# EAGLE board USBRALite14 (EAGLE 6.6.0)
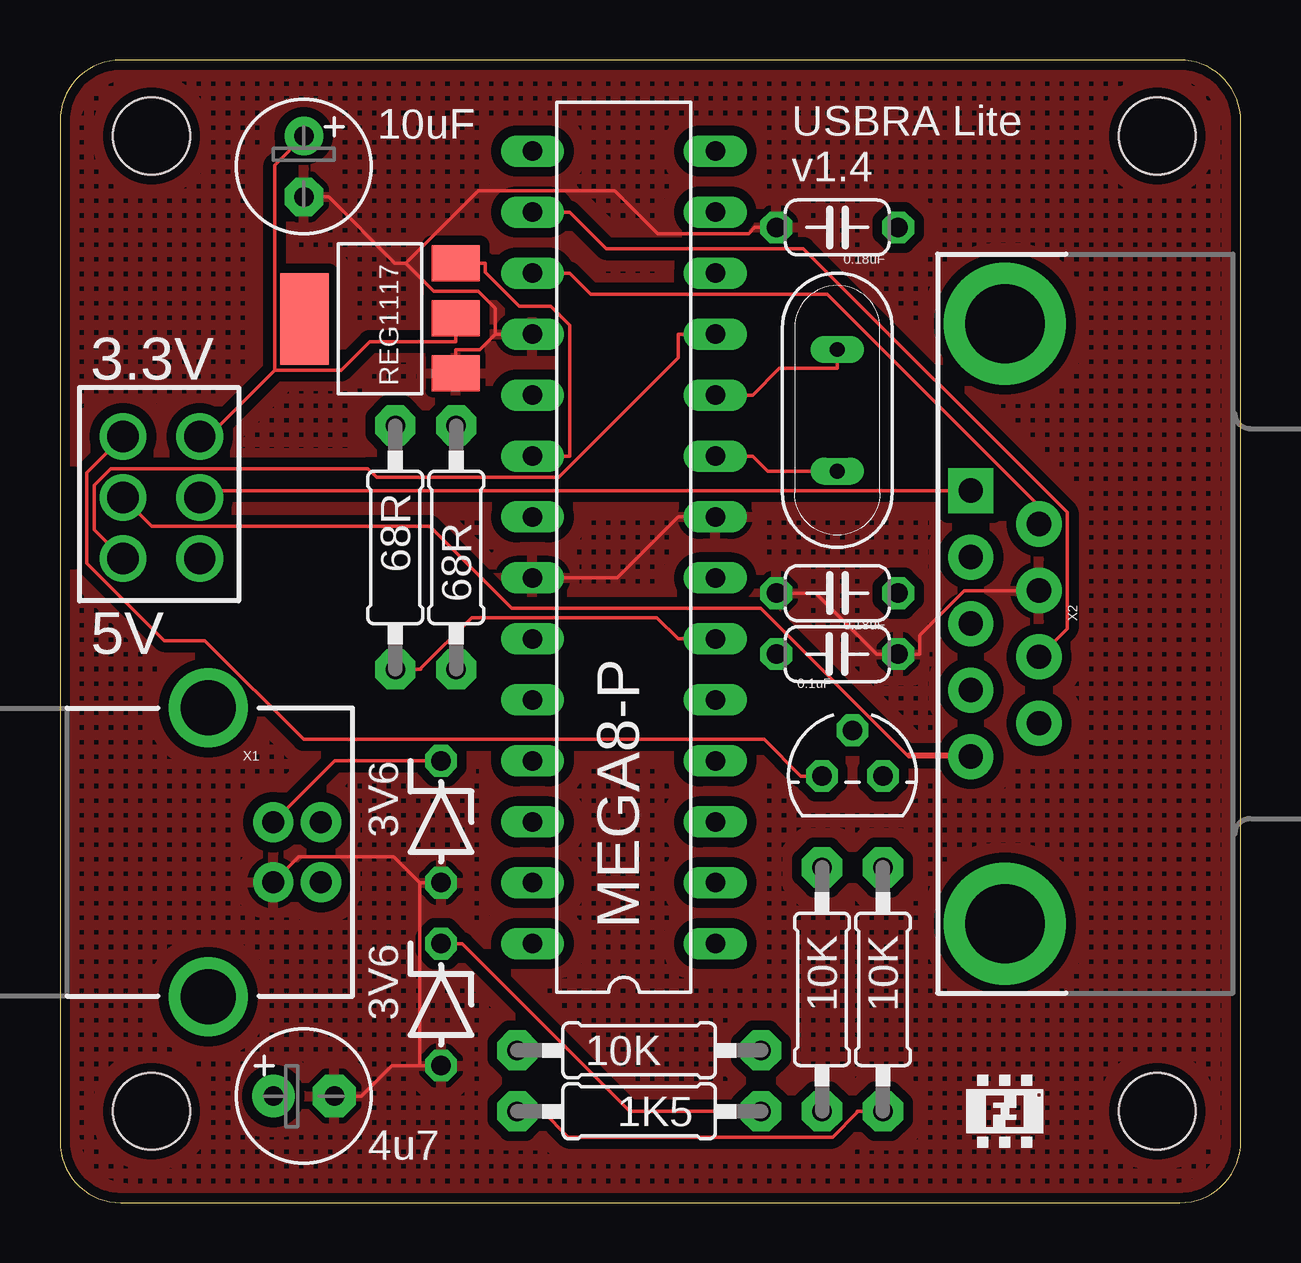
[diagram p0: board, top side]
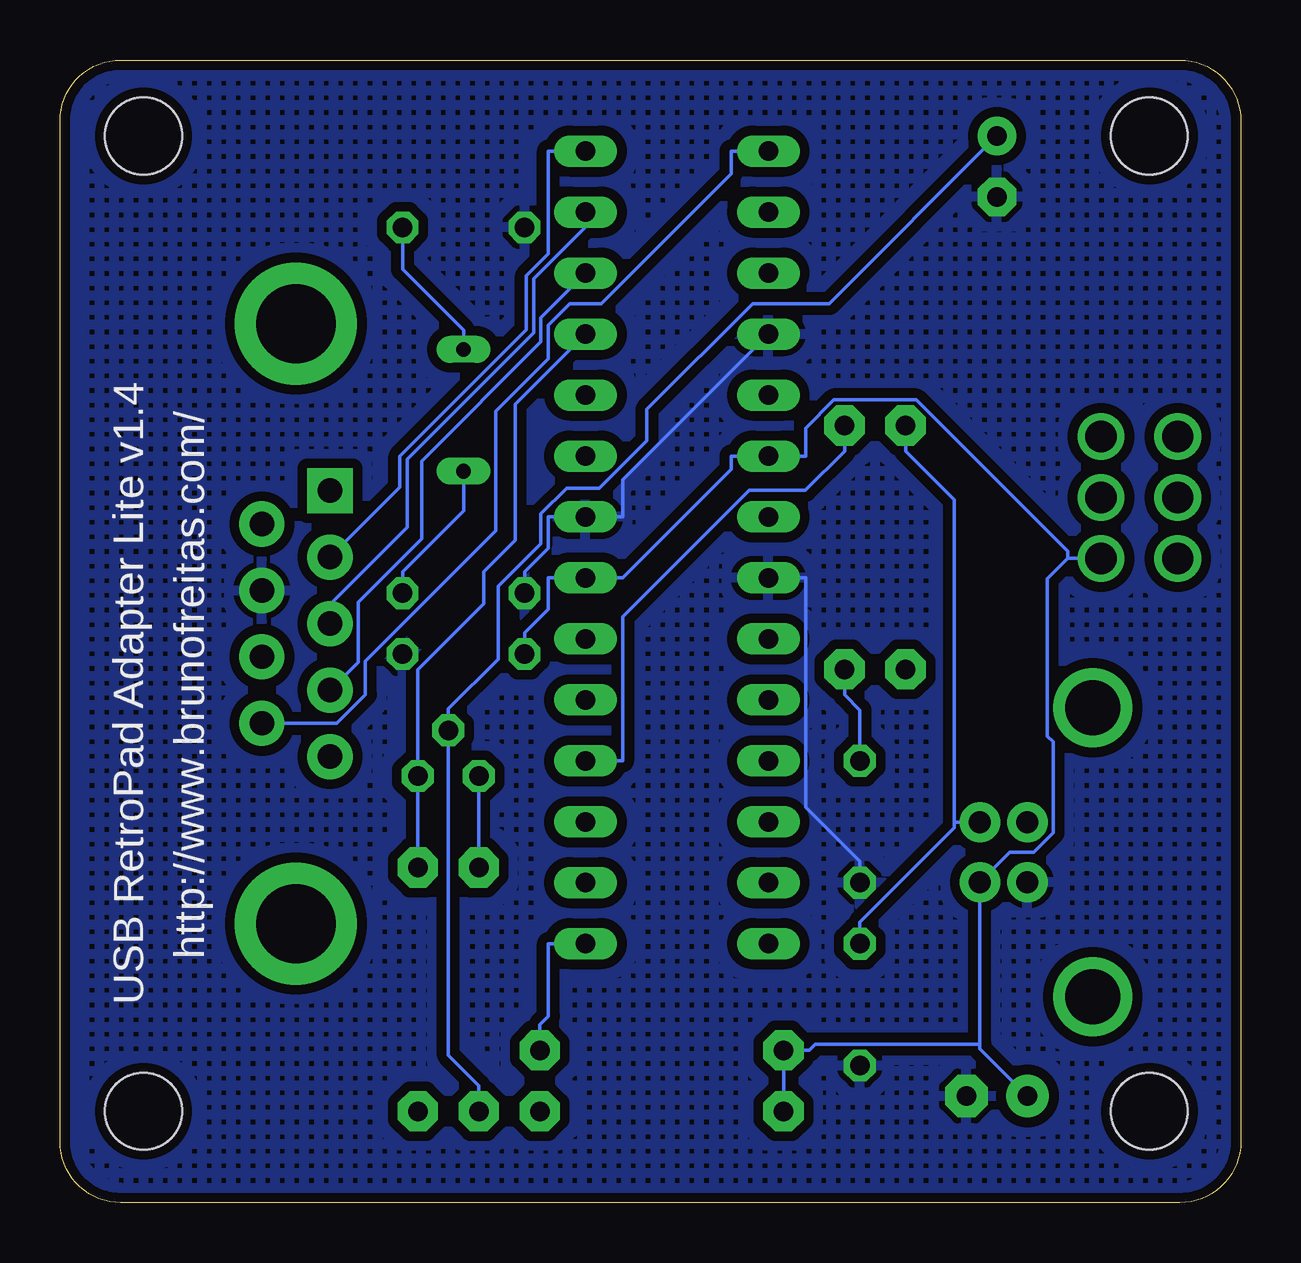
[diagram p1: board, bottom side, seen from below]

Size 49.2 x 47.62 mm. Coordinates in mm from the lower left corner, seen from the top.
Outline: 49.2,45.08 arc90 46.66,47.62 2.54,47.62 arc90 0,45.08 0,2.54 arc90 2.54,0 46.66,0 arc90 49.2,2.54 49.2,45.08
Copper layers (1*16): Top 0.035mm / dielectric 1.5mm / Bottom 0.035mm
Design rules "SeeedStudio_2layer_DRU_no_angle_20140221": minimum track width 6mil, minimum drill 12mil, track to track 6mil, track to pad 6mil, pad to pad 6mil, via to via 6mil, smd to smd 0mil, copper to edge 10mil, drill to drill 10mil, minimum pad ring 10mil, minimum via ring 6mil, stop-mask expansion 2mil, vias tented up to drill 100mil, thermal gap 10mil
Holes 3.2 mm at 3.81,44.45 3.81,3.81 45.72,44.45 45.72,3.81

## Footprints (pad centres in the part's own frame; a part is rotated, then mirrored left to right if it is on the bottom)
TO-92 = drill 0.813 octagon: 1 -1.27,0; 2 0,1.905; 3 1.27,0
C050-024X044 = drill 0.813 octagon: 1 -2.54,0; 2 2.54,0
E2,5-6 = drill 0.813 pad 1.778: + -1.27,0 | drill 0.813 pad 1.778 octagon: - 1.27,0
E2,5-6' = drill 0.813 pad 1.6: + -1.27,0 | drill 0.813 pad 1.6 octagon: - 1.27,0
ZDIO-5 = drill 0.813 octagon: A 2.54,0; C -2.54,0
DIL28-3 = drill 0.813 long: 1 -16.51,-3.81; 2 -13.97,-3.81; 3 -11.43,-3.81; 4 -8.89,-3.81; 5 -6.35,-3.81; 6 -3.81,-3.81; 7 -1.27,-3.81; 8 1.27,-3.81; 9 3.81,-3.81; 10 6.35,-3.81; 11 8.89,-3.81; 12 11.43,-3.81; 13 13.97,-3.81; 14 16.51,-3.81; 15 16.51,3.81; 16 13.97,3.81; 17 11.43,3.81; 18 8.89,3.81; 19 6.35,3.81; 20 3.81,3.81; 21 1.27,3.81; 22 -1.27,3.81; 23 -3.81,3.81; 24 -6.35,3.81; 25 -8.89,3.81; 26 -11.43,3.81; 27 -13.97,3.81; 28 -16.51,3.81
SOT223 = smd 1.499 x 2.007: 1 -2.261,-3.15; 2 0.025,-3.15; 3 2.311,-3.15 | smd 3.81 x 2.007: 4 0,3.15
QS = drill 0.61 long: 1 -2.54,0; 2 2.54,0
0207/10 = drill 0.813 pad 1.676 octagon: 1 -5.08,0; 2 5.08,0
2P2T = drill 1.3 pad 1.93: 1.1 -3.635,-0.085; 1.2 -3.635,-3.285; 2.1 -1.095,-0.085; 2.2 -1.095,-3.285; 3.1 1.445,-0.085; 3.2 1.445,-3.285
USB-B-PTH = drill 0.914 pad 1.676: D+ 0,1.25; D- 1.981,1.25; GND 0,-1.25; VBUS 1.981,-1.25 | drill 2.286: S1 -2.718,-6.02; S2 -2.718,6.02
DB9_MALE = drill 1.016 pad 1.88: 1 5.54,-1.42; 2 2.77,-1.42; 3 0,-1.42; 4 -2.77,-1.42; 6 4.15,1.42; 7 1.38,1.42; 8 -1.38,1.42; 9 -4.15,1.42 | drill 1.016 pad 1.88 square: 5 -5.54,-1.42 | drill 3.302 pad 5.08: G1 -12.5,0; G2 12.5,0

## Placement (x,y rotation side)
2N7000  [TO-92]  33.02,17.78 0 top
C1  0.18uF  [C050-024X044]  32.38,40.64 0 top
C2  0.18uF  [C050-024X044]  32.38,25.4 0 top
C3  0.1uF  [C050-024X044]  32.38,22.86 180 top
C4  4u7  [E2,5-6]  10.16,4.45 0 top
C5  10uF  [E2,5-6']  10.16,43.18 270 top
D1  3V6  [ZDIO-5]  15.88,15.88 270 top
D2  3V6  [ZDIO-5]  15.88,8.26 270 top
IC1  MEGA8-P  [DIL28-3]  23.5,27.3 90 top
IC3  REG1117  [SOT223]  13.34,36.83 90 top
Q1  16MHz  [QS]  32.38,33.02 270 top
R1  10K  [0207/10]  24.13,6.35 0 top
R2  1K5  [0207/10]  24.13,3.81 180 top
R3  68R  [0207/10]  13.97,27.3 270 top
R4  68R  [0207/10]  16.51,27.3 90 top
R9  10K  [0207/10]  31.75,8.89 270 top
R10  10K  [0207/10]  34.29,8.89 270 top
S1  2P2T  [2P2T]  2.54,30.48 90 top
U$1  LOGOLOGO_WITHOUT_SMOKE_SMALL  [LOGO2_SMALL]  39.37,3.81 0 top
X1  USBPTH  [USB-B-PTH]  8.89,14.61 0 top
X2  [DB9_MALE]  39.37,24.13 270 top

## Library data of the parts
2N7000 = transistors
C1-C3 C5 = rcl
C4 R1-R4 R9 R10 = adafruit
D1 D2 = diode
IC1 = atmel; OC_FARNELL: unknown; OC_NEWARK: unknown
IC3 = burr-brown; MPN: REG1117; OC_FARNELL: 1097566; OC_NEWARK: 14P6981
Q1 = special
S1 = Itead_BP_110825
U$1 = F&F
X1 X2 = SparkFun

## Nets
3.3V: 2N7000.2 C5.+ IC3.2 R9.2 S1.3.2
D+: IC1.4 R4.2
D-: IC1.6 R3.2
DB9P1: S1.2.1 X2.1
DB9P5: S1.2.2 X2.5
GND: C1.1 C2.1 C3.1 C4.- C5.- D1.A D2.A IC1.8 IC1.18 IC1.22 IC3.1 X1.GND X2.8
N$1: IC1.1 R1.2
N$2: C2.2 IC1.9 Q1.2
N$3: C1.2 IC1.10 Q1.1
N$8: D1.C R4.1 X1.D+
N$9: D2.C R2.1 R3.1 X1.D-
PB0: IC1.14 X2.4
PB1: IC1.15 X2.6
PB2: IC1.16 X2.7
PB3: IC1.17 X2.9
PB5: IC1.19
PD5: 2N7000.3 IC1.11 R10.1 S1.1.1
PD6: IC1.12 X2.2
PD7: IC1.13 X2.3
PD53V3: 2N7000.1 R9.1 S1.3.1
VCC: C3.2 C4.+ IC1.7 IC1.20 IC3.3 R1.1 R2.2 R10.2 S1.1.2 X1.VBUS

## Tracks (layer width: path | path; a pad name or v marks a point on that pad's centre or on a via)
3.3V
  Top 0.152: 8.95,34.69 8.95,43.24 C5.+ | 5.89,31.93 S1.3.2 5.89,31.9 5.89,31.93 | 5.89,31.93 6.18,31.93 8.95,34.69 | 8.95,34.69 11.71,34.69 12.9,35.88 16.48,35.88 IC3.2
  Bottom 0.152: C5.+ 17.14,37.47 20.34,37.47 24.75,33.06 24.75,31.76 26.73,29.77 28.09,29.77 29.16,28.7 29.16,27.47 30.95,25.68 30.95,22.64 33.02,20.57 2N7000.2 33.02,6.15 31.75,4.88 R9.2
D+
  Bottom 0.152: IC1.4 25.76,18.41 25.76,24.42 20.49,29.69 18.14,29.69 16.51,31.32 R4.2
D-
  Top 0.152: IC1.6 25.76,23.5 24.87,24.39 17.16,24.39 15.04,22.27 15.04,22.23 R3.2
DB9P1
  Top 0.152: 2.69,29.31 S1.2.1 2.64,29.26 2.69,29.31 | 2.69,29.31 3.83,28.18 15.41,28.18 18.82,24.77 29.2,24.77 35.31,18.65 | 35.31,18.65 35.37,18.59 X2.1 37.8,18.69 35.36,18.69 35.31,18.65
DB9P5
  Top 0.152: X2.5 6.11,29.67 5.9,29.46 | 5.9,29.46 S1.2.2 5.89,29.46 5.9,29.46 | X2.5 38,29.67 X2.5
GND
  Top 0.152: C2.1 31.5,25.4 34.04,22.86 C3.1 35.81,22.86 35.81,23.65 37.67,25.51 X2.8 | 14.99,5.71 13.82,5.71 12.55,4.45 C4.- | D2.A 14.99,5.71 | 14.99,13.34 14.99,5.71 | 14.99,13.34 15.06,13.34 D1.A | 14.41,39.14 15.57,37.98 17.43,37.98 18.14,37.28 18.14,36.2 | 14.41,39.14 13.96,39.14 11.19,41.91 C5.- | 14.41,39.14 17.43,42.17 23.12,42.17 24.91,40.38 28.7,40.38 28.96,40.64 C1.1 | IC1.8 25.76,28.57 23.22,26.04 IC1.22 | IC3.1 16.48,35.55 17.49,35.55 18.14,36.2 | IC1.18 18.14,36.2 | X1.GND 9.96,14.42 13.9,14.42 14.99,13.34
  Bottom 0.152: C2.1 29.84,26.29 28.85,27.28 28.85,28.57 IC1.8 25.76,28.57 25.76,30.12 IC1.18 | IC1.22 18.14,26.04 18.14,16.48 15.88,14.22 D1.A
  pour Bottom (isolate 0.406, hatched): 0,48.26 49.53,48.26 49.53,0 0,0
  pour Top (isolate 0.406, hatched): 0,48.26 49.53,48.26 49.53,0 0,0
N$1
  Bottom 0.152: IC1.1 28.85,10.79 28.85,7.77 29.21,7.42 R1.2
N$2
  Top 0.152: IC1.9 28.85,31.11 29.49,30.48 Q1.2
  Bottom 0.152: C2.2 34.92,26.29 32.38,28.83 Q1.2
N$3
  Top 0.152: IC1.10 28.85,33.66 29.97,34.77 32.38,34.77 Q1.1
  Bottom 0.152: Q1.1 32.38,36.35 34.92,38.89 C1.2
N$8
  Top 0.152: 8.91,15.88 X1.D+ 8.94,15.85 8.91,15.88 | 8.91,15.88 11.45,18.41 D1.C
  Bottom 0.152: R4.1 16.51,21.16 15.88,20.52 D1.C
N$9
  Top 0.152: D2.C 16.76,10.79 23.75,3.81 28.14,3.81 R2.1
  Bottom 0.152: 11.94,15.86 11.94,15.62 15.88,11.68 D2.C | 11.94,15.86 11.94,29.29 13.97,31.32 R3.1 | 10.97,15.86 X1.D- 10.97,15.85 10.97,15.86 | 10.97,15.86 11.94,15.86
PB0
  Bottom 0.152: 37.81,27.04 X2.4 37.8,27.03 37.81,27.04 | 37.81,27.04 35.04,29.81 35.04,31.1 29.77,36.37 29.77,38.62 28.85,39.53 28.85,43.81 IC1.14
PB1
  Bottom 0.152: IC1.15 21.23,43.81 21.23,42.88 26.66,37.47 27.95,37.47 28.85,36.56 28.85,35.17 31.04,32.98 31.04,28 36.48,22.57 36.48,21.18 37.67,19.98 40.64,19.98 | X2.6 | X2.6 40.64,19.98 | X2.6 40.64,19.91 40.64,19.98
PB2
  Top 0.152: IC1.16 21.23,41.27 22.76,39.75 30.97,39.75 41.96,28.77 41.96,23.92 40.82,22.78 | 40.82,22.78 X2.7 40.84,22.76 40.82,22.78
PB3
  Top 0.152: IC1.17 21.23,38.73 22.12,37.85 31.98,37.85 40.79,29.03 40.79,28.45 | 40.79,28.45 X2.9 40.84,28.45 40.79,28.45
PD5
  Top 0.152: IC1.11 25.76,36.2 25.76,35.2 20.78,30.23 13.19,30.23 12.82,30.59 2.12,30.59 1.42,29.89 1.42,28.05 2.44,27.03 | 2.44,27.03 S1.1.1 2.44,27.03
  Bottom 0.152: IC1.11 30.24,33.26 30.24,27.6 31.54,26.29 31.54,24.96 34.29,22.21 2N7000.3 R10.1
PD6
  Bottom 0.152: X2.2 36.78,22.53 36.78,25.02 34.13,27.68 34.13,30.9 29.16,35.87 29.16,36.88 IC1.12 | X2.2 38,21.34 X2.2
PD7
  Bottom 0.152: 37.95,24.18 X2.3 38,24.18 37.95,24.18 | 37.95,24.18 37.95,24.93 34.74,28.14 34.74,30.98 29.46,36.25 29.46,38.49 27.3,40.65 IC1.13
PD53V3
  Top 0.152: 2N7000.1 30.86,17.78 29.34,19.3 10.15,19.3 6.03,23.42 4.34,23.42 1.11,26.65 1.11,30.41 S1.3.1 | S1.3.1 | S1.3.1 | S1.3.1 2.64,31.9 S1.3.1
  Bottom 0.152: R9.1 2N7000.1
VCC
  Top 0.152: IC3.3 17.72,39.14 17.72,38.78 19.14,37.36 20.44,37.36 21.23,36.57 21.23,31.11 IC1.20 | R10.2 33.22,3.81 33.22,3.77 32.19,2.74 21.19,2.74 20.12,3.81 R2.2
  Bottom 0.152: 7.21,26.84 7.21,27.15 13.52,33.46 16.95,33.46 18.14,32.27 18.14,31.11 IC1.20 21.23,31.11 21.23,30.56 25.76,26.04 IC1.7 28.85,26.04 28.85,24.74 29.84,23.75 C3.2 | X1.VBUS 10.79,13.43 | 10.79,13.43 9.62,14.61 8.63,14.61 7.82,15.41 7.82,19.21 8.06,19.45 8.06,26 7.21,26.84 | 7.21,26.84 5.89,26.84 | 5.89,26.84 S1.1.2 5.89,26.82 5.89,26.84 | 10.87,6.61 X1.VBUS | C4.+ 10.87,6.43 10.87,6.61 | 10.87,6.61 17.73,6.61 17.98,6.35 R1.1 R2.2 | X1.VBUS 10.77,13.41 10.79,13.43

## Text on the board
tPlace: USBRA Lite | v1.4 | 3.3V | 5V
bPlace: http://www.brunofreitas.com/ | USB RetroPad Adapter Lite v1.4